# Altium PCB CAMERON.PcbDoc (part 2 of 2)
Units mil, origin at the board's own origin, x right, y up, seen from the top; angles counter-clockwise.
Board outline 6000 x 4900 mil, 4 copper layers (Top, POWER, GND, Bottom), stack 33.234 mil thick; 130 components, 117 nets, 635 pads, 146 vias.
Unrouted connection lines stored in the file: 34.
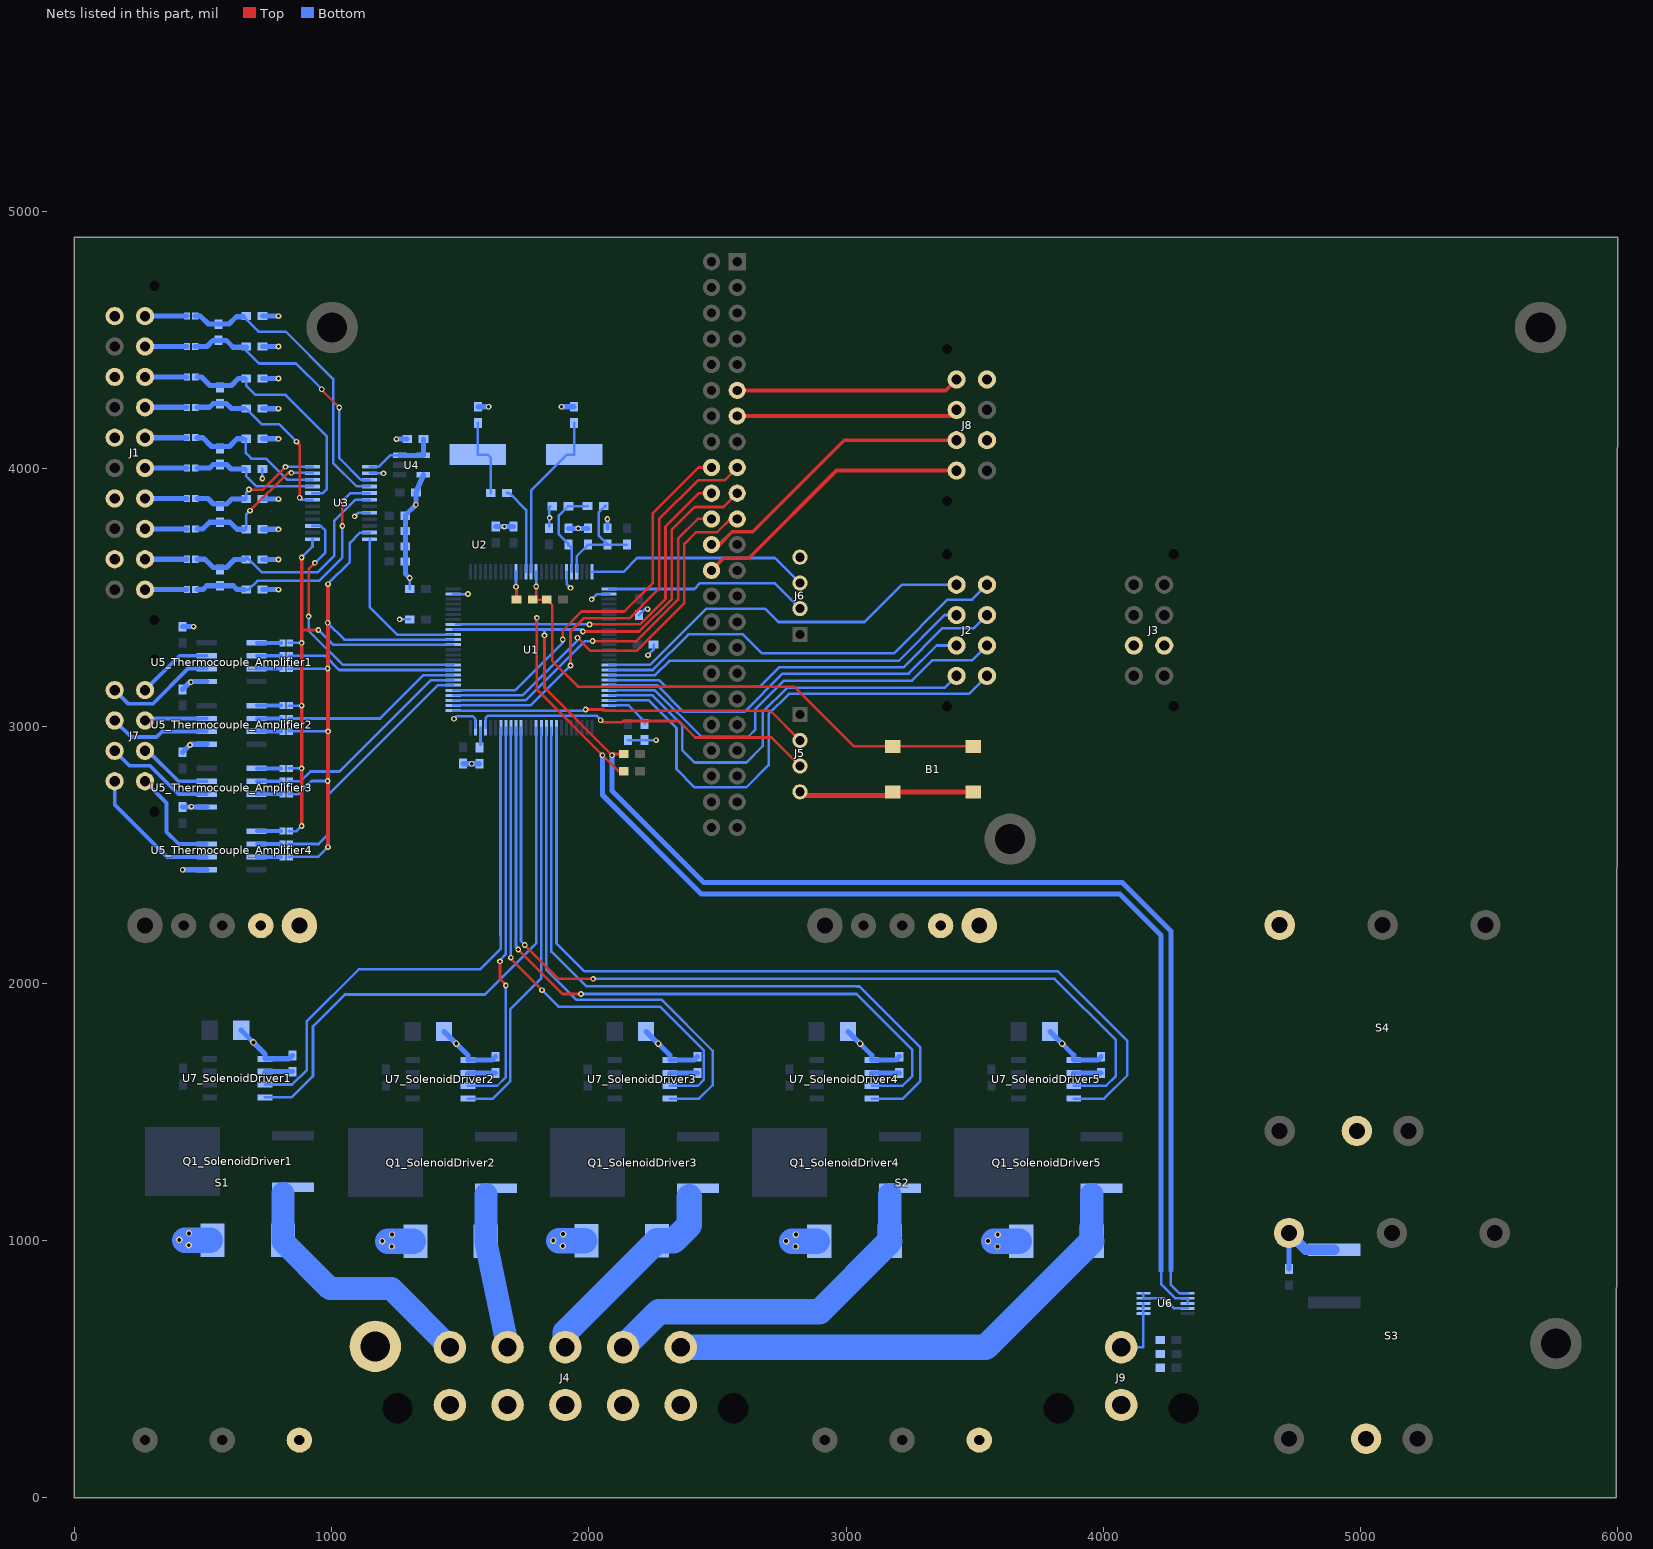
[diagram p4: the nets of this part, all layers, seen from the top]

## Via types
v1: diameter 22, hole 12, Top to Bottom, tented both sides, 87 vias
v2: diameter 35, hole 25, Top to Bottom, tented both sides, 25 vias
v3: diameter 25, hole 15, Top to Bottom, tented both sides, 20 vias
v4: diameter 30, hole 20, Top to Bottom, tented both sides, 14 vias

## Nets (pads, with @x,y where several pads share a name; then routed paths per layer and width w, separated by ;. In a path a pad name is that pad's centre, name@x,y a point inside that pad or via, vN(x,y) a via of type N, cw(c..) or ccw(c..) an arc to the next point about the centre after c; other vN are vias at no path point) (continued)
GND: B1.2 C1.1 C2.1 C3.1 C4.1 C5.1 C6.1 C7.1 C8.1 C9.1 C10.1 C11.1 C12.1 C13.1 C14.2 C15.2 C16.1 C17.1 C19.1 C20.1 C22.1 C23.1 C26.1 C27.1 C28.1 C29.1 C30.1 C31.1 C32.1 C33.1 C34.1 C35.1 C36.1 C37_Thermocouple_Amplifier1.1 C37_Thermocouple_Amplifier2.1 C37_Thermocouple_Amplifier3.1 C37_Thermocouple_Amplifier4.1 C38_SolenoidDriver1.1 C38_SolenoidDriver2.1 C38_SolenoidDriver3.1 C38_SolenoidDriver4.1 C38_SolenoidDriver5.1 C39_SolenoidDriver1.1 C39_SolenoidDriver2.1 C39_SolenoidDriver3.1 C39_SolenoidDriver4.1 C39_SolenoidDriver5.1 C41.1 C42.1 D1_SolenoidDriver1.1 D1_SolenoidDriver2.1 D1_SolenoidDriver3.1 D1_SolenoidDriver4.1 D1_SolenoidDriver5.1 J1.1 J1.5 J1.9 J1.13 J1.17 J3.5 J3.6 J4.2 J4.4 J4.6 J4.8 J4.10 J5.4 J6.4 J8.3 J8.7 J9.2 pad.MOUNT@1170,589 R3.1 R4.1 S1.3 S1.4 S1.5 S2.3 S2.4 S2.5 S3.2 S3.5 S4.2 S4.5 U1.10 U1.20 U1.27 U1.74 U1.99 U3.14 U3.20 U4.5 U5_Thermocouple_Amplifier1.1 U5_Thermocouple_Amplifier2.1 U5_Thermocouple_Amplifier3.1 U5_Thermocouple_Amplifier4.1 U6.4 U6.5 U6.9 U7_SolenoidDriver1.1 U7_SolenoidDriver2.1 U7_SolenoidDriver3.1 U7_SolenoidDriver4.1 U7_SolenoidDriver5.1 | length 5828.7
  Top w10: C36.1@1719,3492 v1@1719,3540
  Top w20: J5.4@2821,2745 2836,2730 3168.17,2730 B1.2@3182.01,2743.83 B1.2@3495,2743.83
  Bottom w10: v1@731.31,3961.69 C29.1@731.31,4000.01 ; v1(1090,3816) 1103.61,3829.61 U3.20@1148,3829.61 ; U3.14@1148,3983.16 v1(1201.84,3983.16) ; v1(1264.74,3415.26) R3.1@1304.13,3415.26 ; C2.1@1304.13,3533.37 v1(1304.13,3575.87) ; U1.99@1472.91,3513.69 v1(1530.31,3513.69) ; v1(1476,3029) 1486,3039 1549,3039 1559.52,3028.48 U1.74@1559.52,2994 ; U1.10@1717,3600.3 v1(1717,3542) v1@1719,3540 ; C6.1@1846,3777 1846,3850.87 C15.2@1850.13,3855 ; U1.20@1913.85,3600.3 1913.85,3553.15 v1(1929,3538) ; v1(2011,3493) 2031.69,3513.69 U1.27@2079.2,3513.69 ; C4.1@2152,2946 C10.1@2217,2946 v1(2262,2946) ; C5.1@2195,3432 2223,3460 2228,3455 v1(2229,3455) ; v1@2229,3275 2252,3298 R4.1@2252,3317 ; U6.5@4156,795.72 U6.4@4156,776.02 4235.98,776.02 v1(4252,760) 4275.38,736.62 U6.9@4328,736.62
  Bottom w15: C13.1@2072.33,3769.13 v1(2072.33,3805.33)
  Bottom w20: v1(421,2442) U5_Thermocouple_Amplifier4.1@514.95,2442 ; C37_Thermocouple_Amplifier4.1@421,2686 U5_Thermocouple_Amplifier3.1@514.95,2686 ; C37_Thermocouple_Amplifier3.1@421,2899 v1@452,2930 ; C37_Thermocouple_Amplifier2.1@421,3143 v1@452,3174 ; C37_Thermocouple_Amplifier1.1@421,3387 v1(464,3387) ; v1(450,2927) v1@452,2930 ; v1(453,3171) v1@452,3174 ; U5_Thermocouple_Amplifier2.1@514.95,2930 v1@452,2930 ; U5_Thermocouple_Amplifier1.1@514.95,3174 v1@452,3174 ; C38_SolenoidDriver1.1@648.76,1818 741.28,1725.48 U7_SolenoidDriver1.1@741.28,1707 835,1707 C39_SolenoidDriver1.1@848,1720 ; C33.1@731.31,3531 v1(793.77,3531) v1@794,3530.77 ; C32.1@731.31,3648.25 v1(793.77,3648.25) v1@794,3648.02 ; C31.1@731.31,3765.51 793.77,3765.51 v1(794,3765.28) ; C30.1@731.31,3882.76 v1(793.77,3882.76) v1@794,3882.53 ; C28.1@731.31,4117.27 v1(793.77,4117.27) v1@794,4117.04 ; C27.1@731.31,4234.52 759.03,4234.52 759.26,4234.29 v1(794,4234.29) ; C26.1@731.31,4351.77 v1(793.77,4351.77) v1@794,4351.54 ; C42.1@731.31,4475.88 v1(793.77,4475.88) ; C41.1@731.31,4593.99 v1(793.77,4593.99) ; v1(1252,4116) C34.1@1294,4116 ; v1(1304.13,3575.87) 1287,3593 C22.1@1287,3640 C19.1@1287,3699.33 C20.1@1287,3758.67 C23.1@1287,3818 1287,3820 v1(1328,3861) C35.1@1328,3909 U4.5@1357,3977.94 ; C38_SolenoidDriver2.1@1437.76,1813.28 1530.28,1720.76 U7_SolenoidDriver2.1@1530.28,1702.28 1624,1702.28 C39_SolenoidDriver2.1@1637,1715.28 ; C3.1@1511.78,2855 1512.78,2854 C11.1@1574,2854 ; C16.1@1569,4242 v1(1611,4242) ; C1.1@1638.26,3776 v1(1672,3776) C7.1@1708,3776 ; v1(1894,4242) C17.1@1943,4242 ; C14.2@1921.33,3769.13 C12.1@1996.67,3769.13 ; C38_SolenoidDriver3.1@2222.76,1813.28 2315.28,1720.76 U7_SolenoidDriver3.1@2315.28,1702.28 2409,1702.28 C39_SolenoidDriver3.1@2422,1715.28 ; C38_SolenoidDriver4.1@3007.76,1813.28 3100.28,1720.76 U7_SolenoidDriver4.1@3100.28,1702.28 3194,1702.28 C39_SolenoidDriver4.1@3207,1715.28 ; C38_SolenoidDriver5.1@3792.76,1813.28 3885.28,1720.76 U7_SolenoidDriver5.1@3885.28,1702.28 3979,1702.28 C39_SolenoidDriver5.1@3992,1715.28 ; C9.1@4722,890 S3.5@4722,1030
  Bottom w40: S3.5@4722,1030 4787.28,964.72 C8.1@4898,964.72
  Bottom w100: 430,1002 D1_SolenoidDriver1.1@529,1002 ; 1219,997.28 D1_SolenoidDriver2.1@1318,997.28 ; 1884,999.28 D1_SolenoidDriver3.1@1983,999.28 ; 2789,997.28 D1_SolenoidDriver4.1@2888,997.28 ; 3574,997.28 D1_SolenoidDriver5.1@3673,997.28
  other v1: 455,2687.22 1545,2854 2230,3276 1959,3769.13 1848,3810 731.31,3963
  other v3: 1234,977.28 2804,977.28 3589,977.28 1899,979.28 445,982 1197,998.28 2767,998.28 3552,998.28 1862,1000.28 408,1003 1235,1023.28 2805,1023.28 3590,1023.28 1900,1025.28 446,1028 1485,1766.05 2270,1766.05 3055,1766.05 3840,1766.05 696,1770.76
GPIO1: J2.8 U1.41 | length 1523
  Bottom w10: U1.41@2079.2,3238.09 2238.09,3238.09 2457,3457 2685,3457 2737,3405 3072,3405 3217,3550 J2.8@3429.89,3550
GPIO2: J2.7 U1.42 | length 1667.4
  Bottom w10: U1.42@2079.2,3218.41 2248.41,3218.41 2387,3357 2599,3357 2673,3283 3186,3283 3395,3492 3490,3492 J2.7@3548,3550
GPIO3: J2.6 U1.43 | length 1494.4
  Bottom w10: U1.43@2079.2,3198.72 2257.72,3198.72 2313,3254 3205,3254 3383.33,3432.33 ; J2.6@3429.89,3431.89 J2.6@3429.89,3432.33 ; 3383.33,3432.33 J2.6@3429.89,3432.33 ; 3383.33,3432.33 J2.6@3429.89,3432.33
GPIO4: J2.5 U1.44 | length 1594.3
  Bottom w10: U1.44@2079.2,3179.04 2272.96,3179.04 2298,3154 2665,3154 2740,3229 3223,3229 3374,3380 3496.11,3380 J2.5@3548,3431.89
I2C_SCL: R17.2 U1.92 U2.19 U6.6 | length 6123.6
  Top w10: v1(1828,3353) 1828,3150 v1(2091,2887) 2096,2892 R17.2@2136,2892 ; v1(1977,3368) 2195.91,3368 2322.8,3494.89 2322.8,3763.8 2411,3852 2523.46,3852 U2.19@2577.13,3905.67
  Bottom w10: U1.92@1472.91,3375.89 1828,3375.89 ; v1@1828,3352 v1(1828,3353) 1828,3375.89 ; v1(1977,3368) 1969.11,3375.89 1828,3375.89 ; 4263,885 4263,828 4295.28,795.72 U6.6@4328,795.72
  Bottom w20: v1(2091,2887) 2091,2748 2446,2393 4072.74,2393 4263,2202.74 4263,885
I2C_SDA: R18.2 U1.93 U2.20 U6.7 U6.8 | length 6200.2
  Top w10: v1(1798,3421) 1798,3142 v1(2053,2887) 2115,2825 R18.2@2136,2825 ; v1(2003,3395.57) 2199.27,3395.57 2298.2,3494.5 2298.2,3776.24 2427.64,3905.67 U2.20@2477.13,3905.67
  Bottom w10: U1.93@1484.52,3395.57 1806,3395.57 ; v1(1798,3421) 1798,3403.57 1806,3395.57 ; v1(2003,3395.57) 2002.13,3396.45 1806.87,3396.45 1806,3395.57 ; 4225,884 4225,832 4280.98,776.02 U6.7@4328,776.02 U6.8@4328,756.32
  Bottom w20: v1(2053,2887) 2053,2732.26 2438.26,2347 4065,2347 4225,2187 4225,884
LimSwitch1-P1: J2.2 U1.47 | length 1733.6
  Bottom w10: U1.47@2079.2,3119.98 2248.02,3119.98 2363,3005 2363,2907 2411,2859 2613,2859 2676,2922 2676,3055 2770,3149 3383.22,3149 J2.2@3429.89,3195.67
LimSwitch1-P2: J2.1 U1.48 | length 1998.1
  Bottom w10: U1.48@2079.2,3100.3 2233.7,3100.3 2341,2993 2341,2833 2411.79,2762.21 2612.21,2762.21 2699,2849 2699,3047 2778,3126 3478.33,3126 J2.1@3548,3195.67
LimSwitch2-P1: J2.4 U1.45 | length 1500.3
  Bottom w10: U1.45@2079.2,3159.35 2264.65,3159.35 2368,3056 2605,3056 2753,3204 3243,3204 3352.78,3313.78 J2.4@3429.89,3313.78
LimSwitch2-P2: J2.3 U1.46 | length 1736.9
  Bottom w10: U1.46@2079.2,3139.67 2257.33,3139.67 2438,2959 2620,2959 2648,2987 2648,3066 2759,3177 3257,3177 3337,3257 3491.22,3257 J2.3@3548,3313.78
MISO: SB2_Thermocouple_Amplifier1.2 SB2_Thermocouple_Amplifier2.2 SB2_Thermocouple_Amplifier3.2 SB2_Thermocouple_Amplifier4.2 U1.90 U3.23 | length 2765.7
  Top w15: v1(985,2787) v1@986,2788 ; v1(986,2530) v1@986,2788 ; v1(986,3552) 986,3225 v1(985,3224) 986,3224 v1(986,2980) v1@986,2788
  Bottom w10: SB2_Thermocouple_Amplifier4.2@834.69,2492 SB2_Thermocouple_Amplifier4.2@837.64,2492 ; SB2_Thermocouple_Amplifier3.2@834.69,2736 SB2_Thermocouple_Amplifier3.2@837.64,2736 ; SB2_Thermocouple_Amplifier1.2@834.69,3224 SB2_Thermocouple_Amplifier1.2@837.64,3224 ; SB2_Thermocouple_Amplifier2.2@837.69,2980 v1(986,2980) ; SB2_Thermocouple_Amplifier2.2@837.69,2981 SB2_Thermocouple_Amplifier2.2@836.69,2982 ; v1(985,2787) 922,2787 871,2736 ; v1(985,3402) 1050.48,3336.52 U1.90@1472.91,3336.52 ; v1(986,2530) 948,2492 ; v1(986,3552) 985,3553 1071,3639 1071,3713 1110.84,3752.84 U3.23@1148,3752.84 ; SB2_Thermocouple_Amplifier2.2@836.69,2982 834.69,2980 SB2_Thermocouple_Amplifier2.2@836.69,2982 ; SB2_Thermocouple_Amplifier4.2@837.64,2492 948,2492 ; SB2_Thermocouple_Amplifier4.2@837.64,2492 948,2492 ; SB2_Thermocouple_Amplifier3.2@837.64,2736 871,2736 ; SB2_Thermocouple_Amplifier3.2@837.64,2736 871,2736 ; SB2_Thermocouple_Amplifier1.2@837.64,3224 v1(985,3224) SB2_Thermocouple_Amplifier1.2@837.64,3224
MOSI: U1.91 U3.24 | length 633.4
  Bottom w10: U3.24@1148,3727.25 1148,3463 1254.8,3356.2 U1.91@1472.91,3356.2
NetC10_2: C10.2 U1.49 | length 173.3
  Bottom w10: U1.49@2079.2,3080.61 2155.39,3080.61 2217,3019 C10.2@2217,3009
NetC11_2: C11.2 U1.73 | length 67.2
  Bottom w10: C11.2@1579.2,2926.8 U1.73@1579.2,2994
NetC12_2: C12.2 C13.2 FB1.1 R1.2 U1.22 | length 490.6
  Bottom w10: U1.22@1953.22,3600.3 1953.22,3660.72 1996.67,3704.17 C12.2@1996.67,3706.13 C13.2@2072,3706.13 ; R1.2@2066,3856 R1.2@2064.03,3856 ; FB1.1@2148,3706.13 C13.2@2072.33,3706.13 C13.2@2072,3706.13 ; 2038,3829.97 2061.08,3853.05 R1.2@2064.03,3856 ; 2038,3829.97 R1.2@2064.03,3856 ; 2038,3829.97 2038,3742.1 C13.2@2072,3708.1 ; C13.2@2072,3706.13 C13.2@2072,3708.1 ; C13.2@2072,3706.13 C13.2@2072,3708.1
NetC14_1: C14.1 C15.1 R1.1 U1.21 | length 366.2
  Bottom w10: U1.21@1933.54,3600.3 1933.54,3691.96 1921.33,3704.17 C14.1@1921.33,3706.13 1921.33,3708.1 1884,3745.44 1884,3819.97 1919.03,3855 C15.1@1921,3855 1994.13,3855 R1.1@1995.13,3856
NetC16_2: C16.2 R2.1 X1.1 | length 315
  Bottom w10: C16.2@1569,4179 X1.1@1569,4056 1607,4056 1619,4044 R2.1@1619,3907
NetC18_1: C18.1 C27.2 SB5.2 U3.7 | length 723
  Top w10: v1(864,4106) 876,4094 v1(876,3888)
  Bottom w10: C27.2@668.31,4234.52 729.83,4173 797,4173 v1(864,4106) ; v1(876,3888) 877,3888 877,3885 881.2,3880.8 U3.7@926,3880.8
  Bottom w20: SB5.2@478,4239.66 526.01,4239.66 540.25,4253.91 C18.1@566,4253.91 591.75,4253.91 611.13,4234.52 C27.2@660.45,4234.52
NetC18_2: C18.2 C26.2 SB4.2 U3.8 | length 980.9
  Bottom w10: C26.2@668.31,4351.77 668.31,4323.69 704,4288 821,4288 982,4127 982,3922 966.39,3906.39 U3.8@926,3906.39
  Bottom w20: SB4.2@478,4357.77 494.81,4357.77 527.81,4324.77 ; C26.2@660.45,4351.77 637.73,4351.77 610.73,4324.77 ; 527.81,4324.77 566,4324.77 610.73,4324.77 ; 527.81,4324.77 610.73,4324.77
NetC21_1: C21.1 C29.2 SB7.2 U3.9 | length 496.9
  Bottom w10: C29.2@668.31,4000.01 668.31,3972.69 709.02,3931.98 U3.9@926,3931.98
  Bottom w20: SB7.2@478,4003.44 526.79,4003.44 540.25,4016.91 C21.1@566,4016.91 591.75,4016.91 608.64,4000.01 C29.2@660.45,4000.01
NetC21_2: C21.2 C28.2 SB6.2 U3.10 | length 664.3
  Bottom w10: C28.2@668.31,4117.27 C28.2@655.73,4117.27 ; U3.10@926,3957.57 828.43,3957.57 746,4040 689,4040 667,4062 C28.2@667,4106 ; C28.2@655.73,4117.27 C28.2@667,4106 ; C28.2@655.73,4117.27 662.02,4110.98 C28.2@667,4106
  Bottom w20: SB6.2@478,4121.55 499.81,4121.55 533.59,4087.77 ; C28.2@655.73,4117.27 632.73,4117.27 603.24,4087.77 ; 533.59,4087.77 566,4087.77 603.24,4087.77 ; 533.59,4087.77 603.24,4087.77
NetC24_1: C24.1 C31.2 SB9.2 U3.11 | length 587.6
  Top w10: v1(683,3838) 830,3985 v1(844,3985)
  Bottom w10: C31.2@668.31,3765.51 668.31,3823.31 v1(683,3838) ; v1(844,3985) 924.16,3985 U3.11@926,3983.16
  Bottom w20: SB9.2@478,3767.22 499.81,3767.22 525.36,3792.77 C24.1@567,3792.77 605.47,3792.77 632.73,3765.51 C31.2@660.45,3765.51
NetC24_2: C24.2 C30.2 SB8.2 U3.12 | length 576.3
  Top w10: v1(679,3920) 733,3920 v1(821,4008)
  Bottom w10: C30.2@668.31,3882.76 668.31,3909.31 v1(679,3920) ; v1(821,4008) 925.25,4008 U3.12@926,4008.75
  Bottom w20: SB8.2@478,3885.33 519.56,3885.33 541.25,3863.64 ; C30.2@660.45,3882.76 611.87,3882.76 592.75,3863.64 ; 541.25,3863.64 567,3863.64 592.75,3863.64 ; 541.25,3863.64 592.75,3863.64
NetC25_1: C25.1 C33.2 SB11.2 U3.17 | length 958.3
  Top w10: v1(1042,3778) v1(1042,3875)
  Bottom w10: C33.2@668.31,3531 678,3531 712,3565 951,3565 1042,3656 v1(1042,3778) ; v1(1042,3875) 1073.39,3906.39 U3.17@1148,3906.39
  Bottom w20: SB11.2@478,3531 499.81,3531 514.72,3545.91 C25.1@566,3545.91 617.83,3545.91 632.73,3531 C33.2@660.45,3531
NetC25_2: C25.2 C32.2 SB10.2 U3.18 | length 1059.5
  Bottom w10: C32.2@668.31,3648.25 C32.2@668.31,3659.31 ; U3.18@1148,3880.8 1093.8,3880.8 1010,3797 1010,3662 946,3598 729.63,3598 ; C32.2@668.31,3659.31 C32.2@673.84,3653.78 ; C32.2@668.31,3659.31 C32.2@673.84,3653.78 ; C32.2@673.84,3653.78 729.63,3598 ; C32.2@673.84,3653.78 729.63,3598
  Bottom w20: SB10.2@478,3649.11 507.91,3649.11 540.25,3616.77 ; C32.2@660.45,3648.25 623.23,3648.25 591.75,3616.77 ; 540.25,3616.77 566,3616.77 591.75,3616.77 ; 540.25,3616.77 591.75,3616.77
NetC39_SolenoidDriver1_2: C39_SolenoidDriver1.2 U7_SolenoidDriver1.2 | length 106.7
  Bottom w20: U7_SolenoidDriver1.2@741.28,1657 C39_SolenoidDriver1.2@848,1657
NetC39_SolenoidDriver2_2: C39_SolenoidDriver2.2 U7_SolenoidDriver2.2 | length 106.7
  Bottom w20: U7_SolenoidDriver2.2@1530.28,1652.28 C39_SolenoidDriver2.2@1637,1652.28
NetC39_SolenoidDriver3_2: C39_SolenoidDriver3.2 U7_SolenoidDriver3.2 | length 106.7
  Bottom w20: U7_SolenoidDriver3.2@2315.28,1652.28 C39_SolenoidDriver3.2@2422,1652.28
NetC39_SolenoidDriver4_2: C39_SolenoidDriver4.2 U7_SolenoidDriver4.2 | length 106.7
  Bottom w20: U7_SolenoidDriver4.2@3100.28,1652.28 C39_SolenoidDriver4.2@3207,1652.28
NetC39_SolenoidDriver5_2: C39_SolenoidDriver5.2 U7_SolenoidDriver5.2 | length 106.7
  Bottom w20: U7_SolenoidDriver5.2@3885.28,1652.28 C39_SolenoidDriver5.2@3992,1652.28
NetC40_1: C40.1 C42.2 SB13.2 U3.15 | length 1037.6
  Top w10: v1(962,4310) 962,4307 v1(1030,4239)
  Bottom w10: C42.2@668.31,4473 668.31,4459.69 718,4410 862,4410 v1(962,4310) ; v1(1030,4239) 1030,4041.91 1114.34,3957.57 U3.15@1148,3957.57
  Bottom w20: SB13.2@470.13,4475.88 515.6,4475.88 539.72,4500 C40.1@561,4500 591,4500 618,4473 C42.2@668.31,4473
NetC40_2: C40.2 C41.2 SB12.2 U3.16 | length 1167.1
  Bottom w10: C41.2@658.31,4592 716.31,4534 822,4534 1006,4350 1006,4024 1098.02,3931.98 U3.16@1148,3931.98
  Bottom w20: SB12.2@470.13,4593.99 490.82,4593.99 521.81,4563 C40.2@561,4563 601,4563 630,4592 C41.2@658.31,4592
NetJ9_1: J9.1 R14.1 R15.1 R16.1 U6.1 U6.2 U6.3 | length 256.6
  Bottom w10: J9.1@4069.91,585.83 4156,585.83 U6.1@4156,716.92 U6.2@4156,736.62 U6.3@4156,756.32
NetSB1_Thermocouple_Amplifier1_1: SB1_Thermocouple_Amplifier1.1 U5_Thermocouple_Amplifier1.6 | length 94.1
  Bottom w15: U5_Thermocouple_Amplifier1.6@709.05,3274 SB1_Thermocouple_Amplifier1.1@803.19,3274
NetSB1_Thermocouple_Amplifier2_1: SB1_Thermocouple_Amplifier2.1 U5_Thermocouple_Amplifier2.6 | length 94.1
  Bottom w15: U5_Thermocouple_Amplifier2.6@709.05,3030 SB1_Thermocouple_Amplifier2.1@803.19,3030
NetSB1_Thermocouple_Amplifier3_1: SB1_Thermocouple_Amplifier3.1 U5_Thermocouple_Amplifier3.6 | length 94.1
  Bottom w15: U5_Thermocouple_Amplifier3.6@709.05,2786 SB1_Thermocouple_Amplifier3.1@803.19,2786
NetSB1_Thermocouple_Amplifier4_1: SB1_Thermocouple_Amplifier4.1 U5_Thermocouple_Amplifier4.6 | length 94.1
  Bottom w15: U5_Thermocouple_Amplifier4.6@709.05,2542 SB1_Thermocouple_Amplifier4.1@803.19,2542
NetSB2_Thermocouple_Amplifier1_1: SB2_Thermocouple_Amplifier1.1 U5_Thermocouple_Amplifier1.7 | length 94.1
  Bottom w15: U5_Thermocouple_Amplifier1.7@709.05,3224 SB2_Thermocouple_Amplifier1.1@803.19,3224
NetSB2_Thermocouple_Amplifier2_1: SB2_Thermocouple_Amplifier2.1 U5_Thermocouple_Amplifier2.7 | length 94.1
  Bottom w15: U5_Thermocouple_Amplifier2.7@709.05,2980 SB2_Thermocouple_Amplifier2.1@803.19,2980
NetSB2_Thermocouple_Amplifier3_1: SB2_Thermocouple_Amplifier3.1 U5_Thermocouple_Amplifier3.7 | length 94.1
  Bottom w15: U5_Thermocouple_Amplifier3.7@709.05,2736 SB2_Thermocouple_Amplifier3.1@803.19,2736
NetSB2_Thermocouple_Amplifier4_1: SB2_Thermocouple_Amplifier4.1 U5_Thermocouple_Amplifier4.7 | length 94.1
  Bottom w15: U5_Thermocouple_Amplifier4.7@709.05,2492 SB2_Thermocouple_Amplifier4.1@803.19,2492
NetSB3_Thermocouple_Amplifier1_1: SB3_Thermocouple_Amplifier1.1 U5_Thermocouple_Amplifier1.5 | length 94.1
  Bottom w15: U5_Thermocouple_Amplifier1.5@709.05,3324 SB3_Thermocouple_Amplifier1.1@803.19,3324
NetSB3_Thermocouple_Amplifier2_1: SB3_Thermocouple_Amplifier2.1 U5_Thermocouple_Amplifier2.5 | length 94.1
  Bottom w15: U5_Thermocouple_Amplifier2.5@709.05,3080 SB3_Thermocouple_Amplifier2.1@803.19,3080
NetSB3_Thermocouple_Amplifier3_1: SB3_Thermocouple_Amplifier3.1 U5_Thermocouple_Amplifier3.5 | length 94.1
  Bottom w15: U5_Thermocouple_Amplifier3.5@709.05,2836 SB3_Thermocouple_Amplifier3.1@803.19,2836
NetSB3_Thermocouple_Amplifier4_1: SB3_Thermocouple_Amplifier4.1 U5_Thermocouple_Amplifier4.5 | length 94.1
  Bottom w15: U5_Thermocouple_Amplifier4.5@709.05,2592 SB3_Thermocouple_Amplifier4.1@803.19,2592
NetU1_77: U1.77 U2.17 | length 1724.8
  Top w10: v1(1929,3236) 1929,3368 1980,3419 2159,3419 2207,3467 2207,3468.7 2271.3,3533 2273.6,3533 2273.6,3804.6 2425,3956 2527.46,3956 U2.17@2577.13,4005.67
  Bottom w10: U1.77@1472.91,3080.61 1773.61,3080.61 v1(1929,3236)
OSC_IN: R2.2 U1.12 | length 342.2
  Bottom w10: R2.2@1682,3907 1683,3906 1691,3906 1756.37,3840.63 U1.12@1756.37,3600.3
OSC_OUT: C17.2 U1.13 X1.2 | length 664.3
  Bottom w10: U1.13@1776.06,3600.3 1776.06,3917.06 1915,4056 X1.2@1943,4056 C17.2@1943,4179
PT1+: J1.8 SB5.1 | length 163.5
  Bottom w20: J1.8@275.11,4239.66 SB5.1@438.63,4239.66
PT1-: J1.6 SB4.1 | length 163.5
  Bottom w20: J1.6@275.11,4357.77 SB4.1@438.63,4357.77
PT2+: J1.12 SB7.1 | length 305.2
  Bottom w20: SB7.1@438.63,4003.44 416.82,4003.44 ; 416.82,4003.44 J1.12@275.11,4003.44 416.82,4003.44
PT2-: J1.10 SB6.1 | length 163.5
  Bottom w20: J1.10@275.11,4121.55 416.82,4121.55 SB6.1@438.63,4121.55
PT3+: J1.16 SB9.1 | length 163.5
  Bottom w20: J1.16@275.11,3767.22 SB9.1@438.63,3767.22
PT3-: J1.14 SB8.1 | length 163.5
  Bottom w20: J1.14@275.11,3885.33 SB8.1@438.63,3885.33
PT4+: J1.20 SB11.1 | length 163.5
  Bottom w20: J1.20@275.11,3531 SB11.1@438.63,3531
PT4-: J1.18 SB10.1 | length 163.5
  Bottom w20: J1.18@275.11,3649.11 SB10.1@438.63,3649.11
PT5+: J1.4 SB13.1 | length 163.5
  Bottom w20: J1.4@275.11,4475.88 SB13.1@438.63,4475.88
PT5-: J1.2 SB12.1 | length 163.5
  Bottom w20: J1.2@275.11,4593.99 SB12.1@438.63,4593.99
PT_CS: U1.85 U3.3 | length 1090.5
  Top w10: v1(911,3427) 911,3611 v1(935,3635)
  Bottom w10: v1(911,3427) 911,3371 1043.91,3238.09 U1.85@1472.91,3238.09 ; U3.3@926,3778.43 957.57,3778.43 976,3760 976,3676 v1(935,3635)
Reset: B1.1 C36.2 R13.1 U1.14 | length 2190.7
  Top w10: v1(1796,3543) 1796,3506 C36.2@1782,3492 R13.1@1837,3492 1858,3471 1858,3254 1958,3154 2798.17,3154 3030.01,2922.17 3493,2922.17 B1.1@3495,2921
  Bottom w10: U1.14@1795.74,3600.3 1795.74,3543.26 v1(1796,3543)
SCK: SB3_Thermocouple_Amplifier1.2 SB3_Thermocouple_Amplifier2.2 SB3_Thermocouple_Amplifier3.2 SB3_Thermocouple_Amplifier4.2 U1.89 U3.1 | length 2069.9
  Top w10: 884,3374 v1(949,3374)
  Top w15: v1(884,2612) v1(884,2836) v1(884,3080) v1(884,3324) 884,3374 v1(884,3656)
  Bottom w10: SB3_Thermocouple_Amplifier4.2@834.69,2592 SB3_Thermocouple_Amplifier4.2@837.64,2592 ; SB3_Thermocouple_Amplifier3.2@834.69,2836 SB3_Thermocouple_Amplifier3.2@837.64,2836 ; SB3_Thermocouple_Amplifier2.2@834.69,3080 SB3_Thermocouple_Amplifier2.2@837.64,3080 ; SB3_Thermocouple_Amplifier1.2@834.69,3324 SB3_Thermocouple_Amplifier1.2@837.64,3324 v1(884,3324) ; v1(884,2612) 864,2592 ; v1(884,3656) 926,3698 U3.1@926,3727.25 ; v1(949,3374) 1006.17,3316.83 U1.89@1472.91,3316.83 ; SB3_Thermocouple_Amplifier4.2@837.64,2592 864,2592 ; SB3_Thermocouple_Amplifier4.2@837.64,2592 864,2592 ; SB3_Thermocouple_Amplifier3.2@837.64,2836 v1(884,2836) SB3_Thermocouple_Amplifier3.2@837.64,2836 ; SB3_Thermocouple_Amplifier2.2@837.64,3080 v1(884,3080) SB3_Thermocouple_Amplifier2.2@837.64,3080
Slave_MISO: U1.79 U2.21 | length 1571.1
  Top w10: v1(1956,3344) 2007,3293 2186,3293 2372,3479 2372,3709 2417,3754 2499,3754 2550.67,3805.67 U2.21@2577.13,3805.67
  Bottom w10: U1.79@1472.91,3119.98 1741.98,3119.98 1956,3334 v1(1956,3344)
Slave_MOSI: U1.80 U2.18 | length 1549.2
  Top w10: v1(1899,3337) 1899,3373 1972,3446 2138,3446 2249,3557 2249,3828 2426.67,4005.67 U2.18@2477.13,4005.67
  Bottom w10: U1.80@1472.91,3139.67 1712.67,3139.67 1899,3326 v1(1899,3337)
Slave_SCK: U1.78 U2.22 | length 1435.5
  Top w10: v1(2015,3331) 2186.4,3331 2347.4,3492 2347.4,3729.4 2423.67,3805.67 U2.22@2477.13,3805.67
  Bottom w10: U1.78@1472.91,3100.3 1754.3,3100.3 1985,3331 v1(2015,3331)
SOL_FAULT1: U1.69 U7_SolenoidDriver1.3 | length 2106
  Bottom w10: U7_SolenoidDriver1.3@741.28,1607 846.89,1607 904,1664.11 904,1853.21 1105.79,2055 1578,2055 1657.94,2134.94 1657.94,2184.77 1657,2185.72 1657,2993.06 U1.69@1657.94,2994
SOL_FAULT2: U1.68 U7_SolenoidDriver2.3 | length 1548.7
  Top w10: v1(1655,2086) 1655,2017 v1@1677.63,1994.37 ; v1(1677.63,1992) v1@1677.63,1994.37 ; v1@1680,1992 v1@1677.63,1994.37
  Bottom w10: U7_SolenoidDriver2.3@1530.28,1602.28 1644.28,1602.28 1677.63,1635.63 v1(1677.63,1992) ; v1(1655,2086) 1650,2086 1677,2113 1677,2993.37 U1.68@1677.63,2994
SOL_FAULT3: U1.67 U7_SolenoidDriver3.3 | length 2052.2
  Top w10: v1(1697.31,2100.31) 1697.31,2094.69 v1(1818,1974)
  Bottom w10: v1(1697.31,2100.31) U1.67@1697.31,2994 ; v1(1818,1974) 1882,1910 2276.17,1910 2447.75,1738.43 2447.75,1625.75 2424.28,1602.28 U7_SolenoidDriver3.3@2315.28,1602.28
SOL_FAULT4: U1.66 U7_SolenoidDriver4.3 | length 2835
  Top w10: v1(1726,2132) 1726,2130 1897,1959 v1(1970,1959)
  Bottom w10: U1.66@1717,2994 1717,2141 v1(1726,2132) ; v1(1970,1959) 3041,1959 3257,1743 3257,1639 3220.28,1602.28 U7_SolenoidDriver4.3@3100.28,1602.28
SOL_FAULT5: U1.65 U7_SolenoidDriver5.3 | length 3620.7
  Top w10: v1(1751,2149.69) 1883.02,2017.67 v1(2017,2017.67)
  Bottom w10: U1.65@1736.69,2994 1736.69,2164 v1(1751,2149.69) ; v1(2017,2017.67) 3811.33,2017.67 4049,1780 4049,1640 4011.28,1602.28 U7_SolenoidDriver5.3@3885.28,1602.28
SOL_OUT1: U1.62 U7_SolenoidDriver1.4 | length 2253.6
  Bottom w10: U7_SolenoidDriver1.4@741.28,1557 845,1557 928,1640 928,1833 1052,1957 1596.74,1957 1795.74,2156 U1.62@1795.74,2994
SOL_OUT2: U1.61 U7_SolenoidDriver2.4 | length 1616.6
  Bottom w10: U7_SolenoidDriver2.4@1530.28,1552.28 1627.28,1552.28 1695,1620 1695,1900 1815.43,2020.43 U1.61@1815.43,2994
SOL_OUT3: U1.60 U7_SolenoidDriver3.4 | length 2040
  Bottom w10: U1.60@1835.11,2994 1835.11,2052.89 1952,1936 2284,1936 2482,1738 2482,1605 2429.28,1552.28 U7_SolenoidDriver3.4@2315.28,1552.28
SOL_OUT4: U1.59 U7_SolenoidDriver4.4 | length 2805.5
  Bottom w10: U1.59@1854.8,2994 1854.8,2124.2 1990.67,1988.33 3042.67,1988.33 3043,1988 3052,1988 3288,1752 3288,1619 3221.28,1552.28 U7_SolenoidDriver4.4@3100.28,1552.28
SOL_OUT5: U1.58 U7_SolenoidDriver5.4 | length 3594.8
  Bottom w10: U1.58@1874.48,2994 1874.48,2156 1983.48,2047 3824,2047 4094,1777 4094,1643 4003.28,1552.28 U7_SolenoidDriver5.4@3885.28,1552.28
SOL_PWR1: D1_SolenoidDriver1.2 J4.9 Q1_SolenoidDriver1.3 | length 1006.5
  Bottom w90: 811.06,1184 D1_SolenoidDriver1.2@811.06,1002 811.06,996.94 993.94,814.06 1231.94,814.06 J4.9@1460.18,585.83
SOL_PWR2: D1_SolenoidDriver2.2 J4.7 Q1_SolenoidDriver2.3 | length 602.1
  Bottom w90: 1600.06,1179.28 D1_SolenoidDriver2.2@1600.06,997.28 J4.7@1684.59,585.83
SOL_PWR3: D1_SolenoidDriver3.2 J4.5 Q1_SolenoidDriver3.3 | length 822.3
  Bottom w100: J4.5@1909,585.83 1909,643.22 D1_SolenoidDriver3.2@2265.06,999.28 2330.28,999.28 2391,1060 2391,1170.22
SOL_PWR4: D1_SolenoidDriver4.2 J4.3 Q1_SolenoidDriver4.3 | length 1389.1
  Bottom w90: D1_SolenoidDriver4.2@3170.06,997.28 3170.06,1179.28
  Bottom w100: J4.3@2133.41,585.83 2271.58,724 2896.78,724 D1_SolenoidDriver4.2@3170.06,997.28
SOL_PWR5: D1_SolenoidDriver5.2 J4.1 Q1_SolenoidDriver5.3 | length 1949.7
  Bottom w90: D1_SolenoidDriver5.2@3955.06,997.28 3955.06,1179.28
  Bottom w100: J4.1@2357.82,585.83 3543.61,585.83 D1_SolenoidDriver5.2@3955.06,997.28
SWCLK: J5.2 U1.76 | length 1400.3
  Top w10: v1(1988,3065) 2058,3065 2062.5,3060.5 2705.5,3060.5 J5.2@2821,2945
  Bottom w10: U1.76@1472.91,3060.93 1473.84,3060 1983,3060 v1(1988,3065)
SWDIO: J5.3 U1.72 | length 1352.7
  Top w10: v1@2046,3026 v1(2046,3023) 2053.5,3015.5 2129.32,3015.5 2133.93,3020.11 2349.89,3020.11 2414,2956 2710,2956 J5.3@2821,2845
  Bottom w10: U1.72@1598.89,2994 1598.89,3031.89 1607,3040 2032,3040 2046,3026 v1(2046,3023)
T+1: J7.2 U5_Thermocouple_Amplifier1.3 | length 295.2
  Bottom w15: J7.2@275.11,3140.33 408.78,3274 U5_Thermocouple_Amplifier1.3@514.95,3274
T+2: J7.4 U5_Thermocouple_Amplifier2.3 | length 243.1
  Bottom w10: J7.4@275.11,3022.22 J7.4@282.89,3030
  Bottom w15: J7.4@282.89,3030 U5_Thermocouple_Amplifier2.3@514.95,3030
T+3: J7.6 U5_Thermocouple_Amplifier3.3 | length 288.8
  Bottom w15: J7.6@275.11,2904.11 286.89,2904.11 405,2786 U5_Thermocouple_Amplifier3.3@514.95,2786
T+4: J7.8 U5_Thermocouple_Amplifier4.3 | length 407.2
  Bottom w15: J7.8@275.11,2786 359,2702.11 359,2589 406,2542 U5_Thermocouple_Amplifier4.3@514.95,2542
T-1: J7.1 U5_Thermocouple_Amplifier1.2 | length 436.8
  Bottom w15: J7.1@157,3140.33 210.33,3087 305,3087 442,3224 U5_Thermocouple_Amplifier1.2@514.95,3224
T-2: J7.3 U5_Thermocouple_Amplifier2.2 | length 393.7
  Bottom w15: J7.3@157,3022.22 221.22,2958 320,2958 342,2980 U5_Thermocouple_Amplifier2.2@514.95,2980
T-3: J7.5 U5_Thermocouple_Amplifier3.2 | length 427.6
  Bottom w15: J7.5@157,2904.11 215.11,2846 294,2846 404,2736 U5_Thermocouple_Amplifier3.2@514.95,2736
T-4: J7.7 U5_Thermocouple_Amplifier4.2 | length 532.5
  Bottom w15: J7.7@157,2786 157,2696 361,2492 U5_Thermocouple_Amplifier4.2@514.95,2492
TC_CS1: SB1_Thermocouple_Amplifier1.2 U1.84 | length 797.6
  Bottom w10: SB1_Thermocouple_Amplifier1.2@834.69,3274 SB1_Thermocouple_Amplifier1.2@837.64,3274 ; U1.84@1472.91,3218.41 1029.59,3218.41 974,3274 ; SB1_Thermocouple_Amplifier1.2@837.64,3274 974,3274 ; SB1_Thermocouple_Amplifier1.2@837.64,3274 974,3274
TC_CS2: SB1_Thermocouple_Amplifier2.2 U1.83 | length 1059.5
  Bottom w10: SB1_Thermocouple_Amplifier2.2@834.69,3030 SB1_Thermocouple_Amplifier2.2@837.64,3030 ; U1.83@1472.91,3198.72 1357.72,3198.72 1189,3030 ; SB1_Thermocouple_Amplifier2.2@837.64,3030 1189,3030 ; SB1_Thermocouple_Amplifier2.2@837.64,3030 1189,3030
TC_CS3: SB1_Thermocouple_Amplifier3.2 U1.82 | length 801
  Bottom w10: SB1_Thermocouple_Amplifier3.2@834.69,2786 SB1_Thermocouple_Amplifier3.2@837.64,2786 880,2786 918,2824 1031,2824 1386.04,3179.04 U1.82@1472.91,3179.04
TC_CS4: SB1_Thermocouple_Amplifier4.2 U1.81 | length 984.1
  Bottom w10: SB1_Thermocouple_Amplifier4.2@834.69,2542 SB1_Thermocouple_Amplifier4.2@837.64,2542 950,2542 987,2579 987,2733 1413.35,3159.35 U1.81@1472.91,3159.35
UART_RX: J6.2 U1.26 | length 792.2
  Bottom w10: U1.26@2079.2,3533.37 2410.37,3533.37 2433,3556 2722,3556 J6.2@2821,3457
UART_TX: J6.3 U1.25 | length 871.1
  Bottom w10: U1.25@2012.28,3600.3 2134.7,3600.3 2188.4,3654 2724,3654 J6.3@2821,3557
VRef: C34.2 U3.13 U4.3 U4.4 | length 290.5
  Bottom w10: U3.13@1148,4008.75 1183.75,4008.75 1227.75,4052.75 U4.3@1265,4052.75
  Bottom w20: U4.3@1265,4052.75 U4.4@1357,4052.75 C34.2@1357,4116
XBEE1_RX: J8.8 U2.11 | length 870.3
  Top w15: U2.11@2577.13,4305.67 3387.56,4305.67 J8.8@3429.89,4348
XBEE1_TX: J8.6 U2.13 | length 862.8
  Top w15: U2.13@2577.13,4205.67 3405.67,4205.67 J8.6@3429.89,4229.89
XBEE2_RX: J8.2 U2.26 | length 1113.5
  Top w15: U2.26@2477.13,3605.67 2524.46,3653 2622,3653 2962.67,3993.67 J8.2@3429.89,3993.67
XBEE2_TX: J8.4 U2.24 | length 1121
  Top w15: U2.24@2477.13,3705.67 2507.67,3705.67 2558,3756 2637.37,3756 2993.15,4111.78 J8.4@3429.89,4111.78
pads on no net: J1.NONE J2.NONE J3.NONE J4.NONE J7.NONE J8.NONE J9.NONE S1.2 S1.6 S2.2 S2.6 S3.4 S3.6 S4.4 S4.6 U1.1 U1.2 U1.3 U1.4 U1.5 U1.7 U1.8 U1.9 U1.15 U1.16 U1.17 U1.18 U1.23 U1.24 U1.29 U1.30 U1.31 U1.32 U1.33 U1.34 U1.35 U1.36 U1.38 U1.39 U1.40 U1.51 U1.52 U1.53 U1.54 U1.55 U1.56 U1.57 U1.63 U1.64 U1.70 U1.71 U1.86 U1.87 U1.88 U1.95 U1.96 U1.97 U1.98 U2.1 U2.2 U2.3 U2.4 U2.7 U2.8 U2.9 U2.10 U2.12 U2.14 U2.15 U2.16 U2.23 U2.25 U2.27 U2.28 U2.29 U2.30 U2.31 U2.32 U2.33 U2.34 U2.35 U2.36 U2.37 U2.38 U2.39 U2.40 U2.41 U2.42 U2.43 U2.44 U2.45 U2.46 U2.NONE U3.2 U3.4 U3.5 U3.6 U3.19 U5_Thermocouple_Amplifier1.8 U5_Thermocouple_Amplifier2.8 U5_Thermocouple_Amplifier3.8 U5_Thermocouple_Amplifier4.8 U7_SolenoidDriver1.7 U7_SolenoidDriver2.7 U7_SolenoidDriver3.7 U7_SolenoidDriver4.7 U7_SolenoidDriver5.7

## Polygon pours and split planes (outlines as drawn)
3V3 on POWER "3V3 Fill" (solid, pour order 91): 5290,2472 5290,2013 5805,2013 5805,2786 5805,4530 1100,4530 1100,3520 345,3520 345,2472
24V on POWER "VCC Fill" (solid, pour order 105): 4013,2421 4013,1615 0,1615 0,2421
36V on POWER "36V-Fill" (solid, pour order 90): 4918,762 5404,762 5404,345 4918,345 4918,0 2795,0 2795,860 4918,860
3V3 on Bottom "3V3 Ground Pour" (solid, remove dead copper, pour order 93): 5245,1928 5245,1931 5245,2452 0,2452 0,4900 6000,4900 6000,1928
Drain_SolenoidDriver1 on Bottom "MOSFET_DRAIN" (solid, pour order 98): 190.78,1261 190.78,1623 464,1623 464,1261
24V on Bottom "MOSFET_POWER" (solid, pour order 103): 544,1731 544,1853 226,1853 226,1652 462,1652 462,1731
24V on Bottom "MOSFET_POWER" (solid, pour order 102): 3688,1726.28 3688,1848.28 3370,1848.28 3370,1647.28 3606,1647.28 3606,1726.28
Drain_SolenoidDriver5 on Bottom "MOSFET_DRAIN" (solid, pour order 97): 3334.78,1256.28 3334.77,1618.28 3608,1618.28 3608,1256.28
24V on Bottom "MOSFET_POWER" (solid, pour order 101): 2903,1726.28 2903,1848.28 2585,1848.28 2585,1647.28 2821,1647.28 2821,1726.28
Drain_SolenoidDriver4 on Bottom "MOSFET_DRAIN" (solid, pour order 96): 2549.78,1256.28 2549.78,1618.28 2823,1618.28 2823,1256.28
24V on Bottom "MOSFET_POWER" (solid, pour order 100): 2118,1726.28 2118,1848.28 1800,1848.28 1800,1647.28 2036,1647.28 2036,1726.28
Drain_SolenoidDriver3 on Bottom "MOSFET_DRAIN" (solid, pour order 95): 1764.78,1256.28 1764.78,1618.28 2038,1618.28 2038,1256.28
24V on Bottom "MOSFET_POWER" (solid, pour order 99): 1333,1726.28 1333,1848.28 1015,1848.28 1015,1647.28 1251,1647.28 1251,1726.28
Drain_SolenoidDriver2 on Bottom "MOSFET_DRAIN" (solid, pour order 94): 979.78,1256.28 979.78,1618.28 1253,1618.28 1253,1256.28
5V on Top "5V Fill" (solid, remove dead copper, pour order 92): 6000,0 6000,4900 0,4900 0,0
GND on GND (split plane): 5974.92,20.1 20.1,20.1 20.1,4879.9 5979.88,4879.9

## Other copper
Bottom:
  rectangle net NetJ9_1: 3912,490 4232,695
  rectangle net 36V: 4422,341 5408,774
  rectangle net 36V: 4285,495 5170,638
  region net 36V: 4374,575
  region: 1467.8,5619.8

## Silkscreen, mask and mechanical layers (free items; w line width, h text height)
Top Overlay:
  drawing of 5923 lines, arcs and shapes, not listed
  text "PT Legend" at 397,4672 h30
  text "GND" at 423,4603 h30
  text "PT-" at 571,4603 h30
  text "XBEE" at 3400.81,4511 h40
  text "5V" at 434,4479 h30
  text "PT+" at 571,4479 h30
  text "P / T / 5" at 27,4455 h30
  text "GND" at 3641,4322.01 h40
  text "XB1-RX" at 3103,4318.67 h40
  text "P / T / 1" at 27,4214 h30
  text "3V3" at 3641,4203.9 h40
  text "XB1-TX" at 3103,4200.56 h40
  text "GND" at 3641,4085.79 h40
  text "XB2-TX" at 3103,4082.45 h40
  text "P / T / 2" at 27,3980 h30
  text "3V3" at 3641,3967.68 h40
  text "XB2-RX" at 3103,3964.34 h40
  text "P / T / 3" at 27,3746 h30
  text "RECOVERY" at 3320.83,3711 h40
  text "GND" at 2904,3637.01 h40
  text "Pressure Transducers" at 417,3551.18 h40 r90
  text "TX" at 2904,3537.01 h40
  text "PE10" at 3182,3524.01 h40
  text "PE11" at 3638,3524.01 h40
  text "3V3" at 3917.99,3524.01 h40
  text "3V3" at 4334,3524.01 h40
  text "P / T / 4" at 27,3512 h30
  text "RX" at 2904,3437.01 h40
  text "UART2" at 2739,3415.59 h40 r90
  text "PE12" at 3182,3405.9 h40
  text "PE13" at 3638,3405.9 h40
  text "5V" at 3957.98,3405.9 h40
  text "5V" at 4334,3405.9 h40
  text "3V3" at 2904,3337.01 h40
  text "PE14" at 3182,3287.79 h40
  text "PE15" at 3638,3287.79 h40
  text "GND" at 3917.99,3287.79 h40
  text "GND" at 4334,3287.79 h40
  text "PB10" at 3182,3169.68 h40
  text "PB11" at 3638,3169.68 h40
  text "24V" at 3917.99,3169.68 h40
  text "24V" at 4334,3169.68 h40
  text "1" at 31.66,3115.25 h40
  text "3V3" at 2896,3025.01 h40
  text "2" at 25,2996.84 h40
  text "SWCLK" at 2896,2925.01 h40
  text "3" at 25,2878.42 h40
  text "SWDIO" at 2896,2825.01 h40
  text "4" at 25,2760.01 h40
  text "GND" at 2896,2725.01 h40
  text "Thermocouples" at 417,2713.25 h40 r90
  text "SWD Header" at 2740,2710 h40 r90
  text "RESET" at 3242,2620 h40
  text "- | +" at 141.58,2588 h40
  text "3V3 Regulator" at 4500,1643 h40 r90
  text "SOL 1" at 1480.17,785 h40 r90
  text "SOL 2" at 1704.58,785 h40 r90
  text "SOL 3" at 1928.99,785 h40 r90
  text "SOL 4" at 2153.4,785 h40 r90
  text "SOL 5" at 2377.81,785 h40 r90
  text "V+" at 4026,770 h60
  text "5V Regulator" at 4553,446 h40 r90
  text "GND" at 4008,127 h60
Bottom Overlay:
  text "C.A.M.E.R.O.N. /  Revision 2" at 5515,4375 h300
  text "Seyed Omid Hassanli" at 2724,60 h80
  text "George Troulis" at 5388,4 h80
Mechanical 1:
  the board outline again, w5

## Dimensions
3638,2561 to 5700,4550 on Mechanical 11
3638,2561 to 5700,4550 on Mechanical 11
5760,600 to 5700,4550 on Mechanical 11
5760,600 to 1170,589 on Mechanical 11
5700,4550 to 1002,4550 on Mechanical 11
0,4900 to 6000,4900 on Mechanical 11
0,0 to 0,4900 on Mechanical 11

## Text inside footprints (layer, text, board x,y; h text height)
U2: Mechanical 13 "RJ45" at 1778,5441 h60 r270